# Altium PCB SPBM004_7THK.PCBDOC
Units mm, origin at the board's own origin, x right, y up, seen from the top; angles counter-clockwise.
Board outline 129.79 x 91.92 mm, 2 copper layers (Top Layer, Bottom Layer); 42 components, 38 nets, 169 pads, 42 vias.
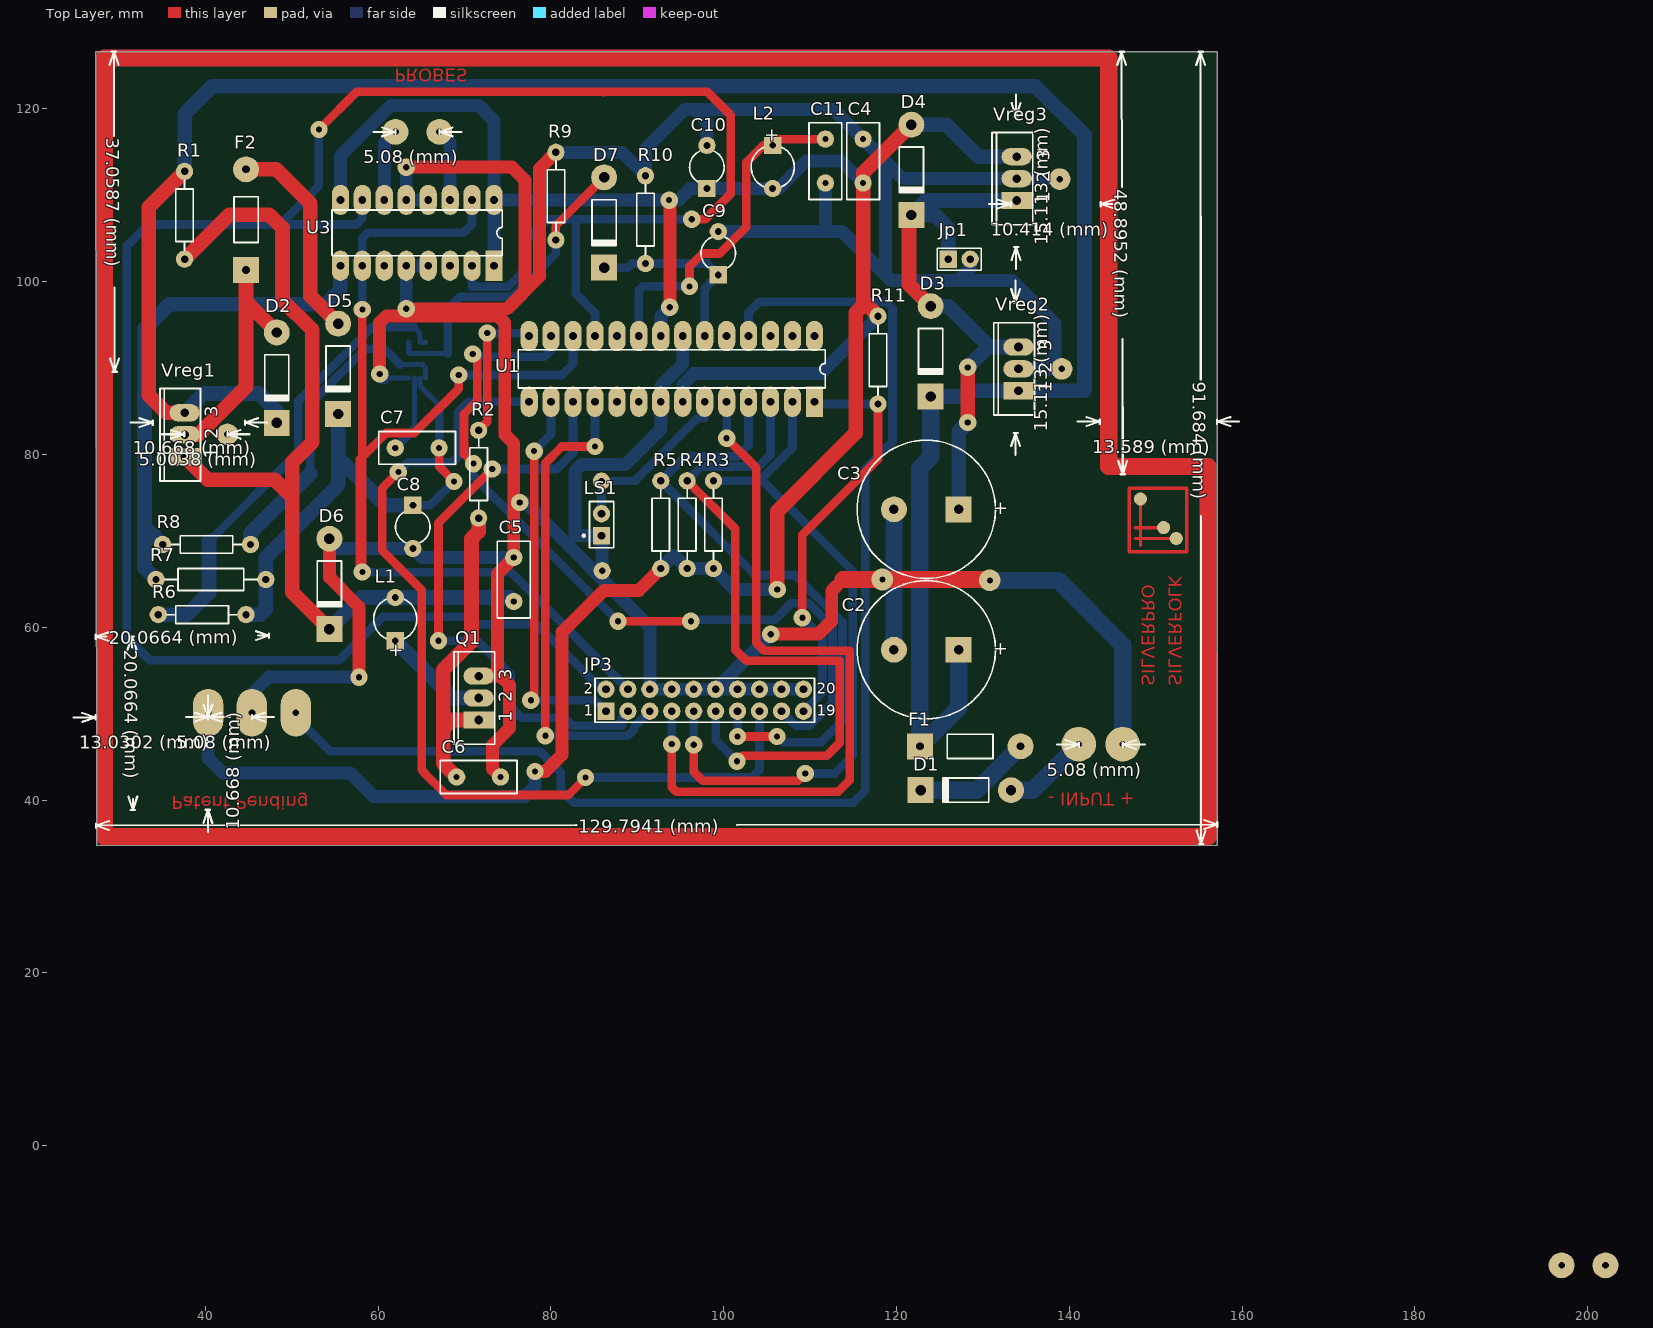
[diagram p0: Top Layer view]
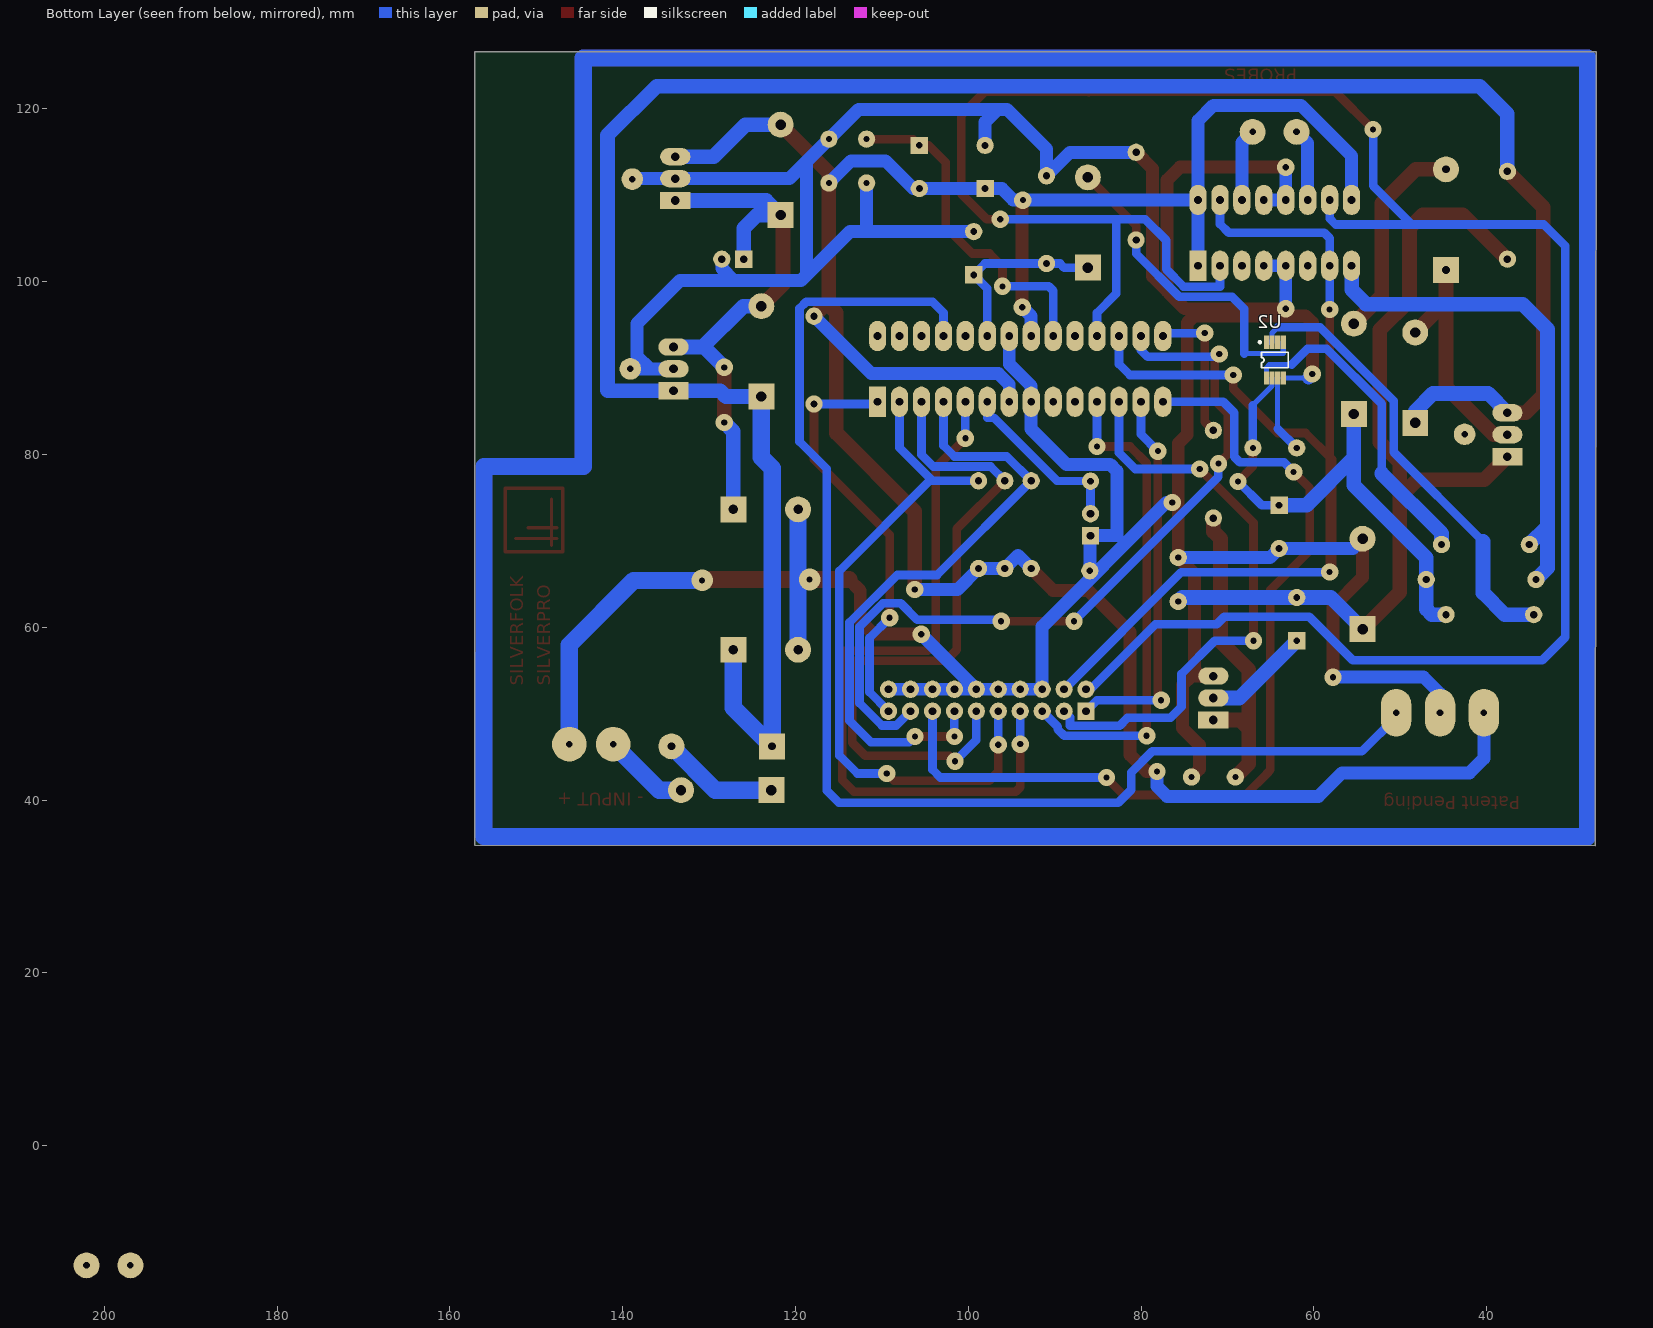
[diagram p1: Bottom Layer view, seen from below]

## Layer stack, top to bottom
Top Layer: signal copper 0.0356
Dielectric: dielectric 0.32, FR-4, Dk 4.8
Bottom Layer: signal copper 0.0356

## Board outline
27.305,126.619 157.099,126.644 157.099,89.052 157.099,34.798 27.41,34.725

## Design rules (kind name [scope] priority, off if disabled: settings)
Clearance [All] p1: gap=0.154
ComponentClearance [All] p1: gap=0.254 collisioncheckmode=0
PolygonConnect [All] p1: connectstyle=Relief reliefconductorwidth=0.254 reliefentries=4 polygonreliefangle="90 Angle"
RoutingLayers [All] p1: top layer=Vertical bottom layer=Horizontal
RoutingVias [All] p1: holewidth=0.711 width=2 viastyle="Through Hole" minholewidth=0.711 minwidth=1.8 maxholewidth=0.711 maxwidth=2
SMDNeckDown [All] p1: percent=90.000
SolderMaskExpansion [All] p1: expansion=0.102
TestPointUsage [All] p1: valid=0 allowmultiple=FALSE
Testpoint [All] p1: side=15 testpointundercomponent=TRUE minsize=1.016 maxsize=2.54 preferedsize=1.524 minholesize=0 maxholesize=1.016 preferedholesize=0.813 testpointgrid=0.025 style=1023 order=1234567890
Width Ground [InNet('GND')] p1: maxlimit=3 minlimit=1 preferedwidth=1.5
Width 5volts [InNet('NetC4_1')] p2: maxlimit=2 minlimit=1 preferedwidth=1.5
Width [All] p3: maxlimit=2 minlimit=0.5 preferedwidth=1
16 further rules are at their usual default settings.

## Components (designator, comment, footprint, x,y, rotation, side; value= is the part's Value field where it differs from the comment)
C2 "Cap1" CAPPR7.5-16X35 123.444,57.404 r180 top
C3 "Cap1" CAPPR7.5-16X35 123.444,73.66 r180 top
C4 "Cap1" RAD-0.2 116.129,113.97 r90 top
C5 "Cap" RAD-0.2 75.692,65.532 r270 top
C6 "Cap" RAD-0.2 71.628,42.672 r180 top
C7 "Cap" RAD-0.2 64.516,80.772 r0 top
C8 "Cap1" CAPR5-4X5 64.008,71.628 r270 top
C9 "Cap1" CAPR5-4X5 99.365,103.302 r90 top
C10 "Cap10" CAPR5-4X5 98.044,113.284 r90 top
C11 "Cap" RAD-0.2 111.76,113.97 r90 top
D1 "SR160" DIO10.46-5.3x2.8 128.016,41.148 r180 top
D2 "Diode 1N4001" DIO10.46-5.3x2.8 48.26,88.9 r270 top
D3 "Diode 1N4001" DIO10.46-5.3x2.8 123.952,91.948 r270 top
D4 "Diode 1N4001" DIO10.46-5.3x2.8 121.717,112.954 r270 top
D5 "Diode 1N4001" DIO10.46-5.3x2.8 55.372,89.916 r270 top
D6 "Diode 1N4001" DIO10.46-5.3x2.8 54.356,65.024 r270 top
D7 "Diode 1N4001" DIO10.46-5.3x2.8 86.157,106.858 r270 top
F1 "3.0A" PIN-W2/E2.8 128.524,46.228 r0 top
F2 "1.0A" PIN-W2/E2.8 44.704,107.188 r90 top
Jp1 "Header 2" HDR1X2 125.984,102.616 r0 top
JP3 "Header 10X2" HDR2X10 86.36,50.292 r0 top
L1 "Inductor" CAPPR5-5X5 61.976,60.96 r90 top
L2 "Inductor Adj" CAPPR5-5X5 105.664,113.284 r270 top
LS1 "Pizo" PIN2 85.852,70.612 r90 top
Q1 "IRL520" TO-220AB 71.628,51.816 r90 top
R1 "Res1" AXIAL-0.4 37.592,107.696 r90 top
R2 "Res1" AXIAL-0.4 71.628,77.724 r270 top
R3 "Res1" AXIAL-0.4 98.806,71.882 r90 top
R4 "Res1" AXIAL-0.4 95.758,71.882 r90 top
R5 "Res1" AXIAL-0.4 92.71,71.882 r90 top
R6 "Res1" AXIAL-0.4 39.624,61.468 r0 top
R7 "Res1" AXIAL-0.5 40.64,65.532 r180 top
R8 "Res1" AXIAL-0.4 40.132,69.596 r180 top
R9 "Res1" AXIAL-0.4 80.569,109.906 r270 top
R10 "Res1" AXIAL-0.4 90.932,107.188 r270 top
R11 "Res1" AXIAL-0.4 117.856,90.932 r90 top
U1 "ATmega8-16PI" 28P3 93.98,89.916 r180 top
U2 "LTC6102" MS8 64.516,90.932 r180 bottom
U3 "SN754410NE" NE016 64.516,105.664 r180 top
Vreg1 "LM317AT" T03B 37.592,82.296 r90 top
Vreg2 "LM7812CT" T03B 134.112,89.916 r90 top
Vreg3 "LM7805CT" T03B 133.909,111.938 r90 top

## Footprints (in the part's own frame and the unit in brackets; to place one, negate y for a bottom-side part, rotate by r counter-clockwise, add the part's x,y. Pads: shape width x height; smd on the part's side, far side on the other; paste and mask are expansions set on the pad)
28P3 [mm] "DIP; 28 Leads; Row Spacing 7.62 mm; Pitch 2.54 mm"
  rect 2x3.5 hole 0.9: 1(-16.51,3.81)
  oval 2x3.5 hole 0.9: 2(-13.97,3.81) 3(-11.43,3.81) 4(-8.89,3.81) 5(-6.35,3.81) 6(-3.81,3.81) 7(-1.27,3.81) 8(1.27,3.81) 9(3.81,3.81) 10(6.35,3.81) 11(8.89,3.81) 12(11.43,3.81) 13(13.97,3.81) 14(16.51,3.81) 15(16.51,-3.81) 16(13.97,-3.81) 17(11.43,-3.81) 18(8.89,-3.81) 19(6.35,-3.81) 20(3.81,-3.81) 21(1.27,-3.81) 22(-1.27,-3.81) 23(-3.81,-3.81) 24(-6.35,-3.81) 25(-8.89,-3.81) 26(-11.43,-3.81) 27(-13.97,-3.81) 28(-16.51,-3.81)
  silkscreen extent -17.78,-2.22 17.78,2.22
AXIAL-0.4 [mm]
  round 2 hole 0.85: 1(-5.08,0) 2(5.08,0)
  silkscreen extent -4.06,-1.02 4.06,1.02
AXIAL-0.5 [mm]
  round 2 hole 0.85: 1(-6.35,0) 2(6.35,0)
  silkscreen extent -5.33,-1.27 5.33,1.27
CAPPR5-5X5 [mm]
  rect 2x2 hole 0.75: 1(-2.5,0)
  round 2 hole 0.8: 2(2.5,0)
  silkscreen extent -2.26,-2.5 2.27,2.5
CAPPR7.5-16X35 [mm]
  rect 3x3 hole 1.1: 1(-3.75,0)
  round 3 hole 1.1: 2(3.75,0)
  silkscreen extent -8,-8 8,8
CAPR5-4X5 [mm]
  rect 2x2 hole 0.8: 1(-2.5,0)
  round 2 hole 0.8: 2(2.5,0)
  silkscreen extent -1.69,-2 1.82,2
DIO10.46-5.3x2.8 [mm]
  round 3 hole 1.2: 1(-5.23,0)
  rect 3x3 hole 1.2: 2(5.23,0)
  silkscreen extent -2.65,-1.41 2.75,1.4
HDR1X2 [mm] "Connector; Header; 2 Position"
  rect 2x2 hole 0.9: 1(0,0)
  round 2 hole 0.9: 2(2.54,0)
  silkscreen extent -1.27,-1.27 3.81,1.27
HDR2X10 [mm] "Connector; Header; 10x2 Position"
  rect 2x2 hole 0.9: 1(0,0)
  round 2 hole 0.9: 2(0,2.54) 3(2.54,0) 4(2.54,2.54) 5(5.08,0) 6(5.08,2.54) 7(7.62,0) 8(7.62,2.54) 9(10.16,0) 10(10.16,2.54) 11(12.7,0) 12(12.7,2.54) 13(15.24,0) 14(15.24,2.54) 15(17.78,0) 16(17.78,2.54) 17(20.32,0) 18(20.32,2.54) 19(22.86,0) 20(22.86,2.54)
  silkscreen extent -1.27,-1.27 24.13,3.81
MS8 [mm] "Shrink Small Outline; 8 Leads; Body Width 3 mm; Pitch 0.65 mm"
  rect 0.6x1.55 smd: 1(-0.975,2.075) 2(-0.325,2.075) 3(0.325,2.075) 4(0.975,2.075) 5(0.975,-2.075) 6(0.325,-2.075) 7(-0.325,-2.075) 8(-0.975,-2.075)
  silkscreen extent -1.85,-0.9 1.55,2.2
NE016 [mm] "DIP; 16 Leads; Row Spacing 7.62 mm; Pitch 2.54 mm"
  rect 2x3.5 hole 0.9: 1(-8.89,3.81)
  oval 2x3.5 hole 0.9: 2(-6.35,3.81) 3(-3.81,3.81) 4(-1.27,3.81) 5(1.27,3.81) 6(3.81,3.81) 7(6.35,3.81) 8(8.89,3.81) 9(8.89,-3.81) 10(6.35,-3.81) 11(3.81,-3.81) 12(1.27,-3.81) 13(-1.27,-3.81) 14(-3.81,-3.81) 15(-6.35,-3.81) 16(-8.89,-3.81)
  silkscreen extent -9.85,-2.65 9.85,2.65
PIN2 [mm]
  rect 2x2 hole 0.9: 1(0,0)
  round 2 hole 0.9: 2(2.54,0)
  silkscreen extent -1.4,-1.4 3.94,2.17
PIN-W2/E2.8 [mm]
  rect 3x3 hole 0.9: 1(-5.825,0)
  round 3 hole 0.9: 2(5.825,0)
  silkscreen extent -2.65,-1.4 2.65,1.4
RAD-0.2 [mm]
  round 2 hole 0.7: 1(-2.54,0) 2(2.54,0)
  silkscreen extent -4.44,-1.91 4.44,1.91
T03B [mm] "TO, Thru-Hole, Vertical, Heatsink Mounted; 3 In-Line Leads; Pitch 2.54 mm"
  rect 2x3.5 hole 1: 1(-2.54,0)
  oval 2x3.5 hole 1: 2(0,0) 3(2.54,0)
  silkscreen extent -5.35,-1.85 5.35,2.85
TO-220AB [mm] "TO, Thru-Hole, Vertical, Heatsink Mounted; 3 In-Line Leads; Pitch 2.54 mm"
  rect 2x3.5 hole 1: 1(-2.54,0)
  oval 2x3.5 hole 1: 2(0,0) 3(2.54,0)
  silkscreen extent -5.35,-1.85 5.35,2.85

## Part data
C2 C3 C4 C8 C9 C10: library part Cap2, "Capacitor"
C5 C6 C7 C11: "Capacitor"
D1: library part "Diode 11DQ03", "Schottky Rectifier"
D2 D3 D4 D5 D6 D7: "1 Amp General Purpose Rectifier"
F1 F2: library part "Fuse 2", "Fuse"
Jp1: "Header, 2-Pin"
JP3: "Header, 10-Pin, Dual row"
L1: library part "Inductor Adj", "Adjustable Inductor"
L2: "Adjustable Inductor"
LS1: library part Speaker, "Loudspeaker"
Q1: "HEXFET N-Channel Power MOSFET"
R1 R2 R3 R4 R5 R6 R7 R8 R9 R10 R11: "Resistor"
U1: "8-Bit AVR Microcontroller with 8K Bytes of In-System Programmable Flash Memory"
U2: library part LTC1150CS8, "?5V Chopper Stabilised Operational Amplifier with Internal Capacitors"
U3: "Quadruple Half-H Driver"
Vreg1: "3-Terminal Adjustable Regulator"
Vreg2: library part LM7805CT, "Series 3-Terminal Positive Regulator"
Vreg3: "Series 3-Terminal Positive Regulator"

## Free pads (board coordinates)
  oval 3.524x5.524 hole 0.762: 0(45.39,50.114) 1(40.31,50.114) 2(50.47,50.114)
  round 2 hole 0.762: 0(85.852,76.911) 1(85.928,66.548)
  round 3 hole 0.762: 2(67.081,117.348) 2(196.977,-13.843) 3(62.001,117.348) 3(202.057,-13.843)
  round 2.5 hole 0.762: 2(138.887,111.887) 3(139.116,89.916) 4(42.545,82.347)
  round 4 hole 0.762: 2(141.097,46.482) 3(146.177,46.482)
  round 1.524 smd: 2(152.375,70.282) 3(150.901,71.552) 4(148.234,74.854)

## Via types
v1: diameter 2, hole 0.711, Top Layer to Bottom Layer, 40 vias
v2: diameter 2.5, hole 0.711, Top Layer to Bottom Layer, 2 vias

## Nets (pads, with @x,y where several pads share a name; then routed paths per layer and width w, separated by ;. In a path a pad name is that pad's centre, name@x,y a point inside that pad or via, vN(x,y) a via of type N, cw(c..) or ccw(c..) an arc to the next point about the centre after c; other vN are vias at no path point)
GND: C2.2 C3.2 C4.2 C5.1 C6.1 C8.2 C9.2 C10.2 C11.1 D6.1 Jp1.2 JP3.6 JP3.8 JP3.10 JP3.12 JP3.14 JP3.16 JP3.18 JP3.20 LS1.1 pad.0@45.39,50.114 pad.1@85.928,66.548 pad.2@138.887,111.887 pad.3@139.116,89.916 pad.3@146.177,46.482 Q1.3 R9.1 R10.1 U1.8 U1.22 U2.5 U3.4 U3.5 U3.12 U3.13 Vreg2.2 Vreg3.2 | length 534.6
  Top Layer w1.5: D6.1 54.356,65.786 57.785,62.357 v1(57.785,54.229) ; v1(60.173,89.332) 60.173,95.275 60.96,96.063 73.838,96.063 ; v1(63.246,96.876) 74.93,96.876 78.664,100.609 78.664,113.081 R9.1 ; v1(63.246,113.259) 75.489,113.259 76.987,111.76 76.987,98.933 ; 73.025,96.876 74.651,95.25 74.651,82.321 75.692,81.28 C5.1 73.787,66.167 73.787,55.067 73.025,54.305 71.679,54.305 Q1.3 74.168,54.356 75.209,53.315 75.209,48.336 73.228,46.355 73.228,43.612 C6.1 ; v1@75.692,73.762 v1(76.378,74.447) ; v1(105.435,59.207) 110.947,59.207 112.497,60.757 112.497,64.237 113.792,65.532 ; v2@130.708,65.532 v2(130.81,65.43)
  Top Layer w2: 113.792,65.532 v2@130.708,65.532
  Bottom Layer w0.36: U2.5 U2.5@63.541,88.875
  Bottom Layer w0.6: v1@60.63,88.875 U2.5@63.541,88.875
  Bottom Layer w1.5: pad.0@45.39,50.114 45.39,52.349 47.295,54.254 v1(57.785,54.229) ; D6.1 55.482,69.128 C8.2 65.064,68.072 C5.1 ; v1(60.173,89.332) v1@60.63,88.875 ; v1(63.246,96.876) U3.5 U3.4 ; v1(63.246,113.259) U3.12 U3.13 ; v1(76.378,74.447) 77.064,74.447 91.44,60.071 JP3.6 JP3.8 JP3.10 JP3.12 ; R9.1 88.214,114.986 R10.1 90.932,115.392 95.504,119.964 112.674,119.964 120.701,111.938 138.836,111.938 pad.2@138.887,111.887 ; pad.1@85.928,66.548 85.928,70.536 LS1.1 82.804,70.612 82.804,78.105 83.566,78.867 88.642,78.867 92.71,82.935 U1.8 92.71,87.935 95.25,90.475 U1.22 ; 96.571,119.964 98.044,118.491 C10.2 ; C9.2 113.705,105.802 119.38,100.127 133.375,100.127 138.354,95.148 138.354,91.415 136.855,89.916 ; v1(105.435,59.207) JP3.12 ; JP3.20 JP3.18 JP3.16 JP3.14 JP3.12 ; 111.76,105.802 C11.1 ; 118.72,100.787 118.72,113.919 ; 119.643,65.557 119.694,65.507 ; 127.102,100.127 128.524,101.549 Jp1.2 ; Vreg2.2 pad.3@139.116,89.916
  Bottom Layer w2: v2(118.364,65.532) 119.643,65.557 ; C2.2 C3.2 ; v2(130.81,65.43) 138.709,65.43 146.177,57.963 pad.3@146.177,46.482
NC: U2.3
NetC1_1: C2.1 D2.2 D3.2 F1.1 R1.2 Vreg1.3 Vreg2.1 | length 262.6
  Top Layer w1.7: Vreg1.3 35.484,84.836 33.452,86.868 33.452,88.798 33.452,108.636 R1.2
  Bottom Layer w1: F1.1 F1.1@122.733,46.228 ; Vreg2.1@134.036,87.376 Vreg2.1@134.061,87.351 ; 141.707,87.376 141.757,87.427
  Bottom Layer w1.7: Vreg1.3 39.827,87.071 46.203,87.071 48.26,85.014 D2.2 ; R1.2 37.592,119.431 40.792,122.631 136.068,122.631 141.757,116.942 141.757,90.703 141.757,87.427 ; D3.2 128.044,86.718 128.702,87.376 Vreg2.1 141.707,87.376
  Bottom Layer w2: F1.1 122.699,78.427 123.952,79.68 D3.2 ; F1.1@122.733,46.228 127.194,50.689 C2.1
NetC3_1: C3.1 D3.1 D4.2 Jp1.1 Vreg2.3 Vreg3.1 | length 65.7
  Top Layer w1: D4.2@121.437,107.444 D4.2 ; Vreg3.1 Vreg3.1@134.112,109.398
  Top Layer w1.7: D4.2@121.437,107.444 121.437,99.693 D3.1 ; v1(128.245,83.718) v1(128.245,90.094)
  Bottom Layer w1.7: D3.1 126.012,97.178 130.734,92.456 ; Jp1.1 125.984,106.2 124.46,107.724 D4.2 123.391,109.398 Vreg3.1 ; C3.1 127.194,82.668 v1(128.245,83.718) ; v1(128.245,90.094) 130.607,92.456 Vreg2.3
NetC4_1: C4.1 C10.1 D4.1 L2.2 pad.1@40.31,50.114 R3.1 R4.1 R5.1 R11.2 U1.7 U1.21 U3.1 U3.9 U3.16 Vreg3.3 | length 304.4
  Top Layer w1.5: v1(78.156,43.307) 79.35,43.307 81.28,45.237 81.28,59.436 86.131,64.287 90.195,64.287 R5.1 ; v1(93.675,109.449) 93.751,109.372 v1(93.751,97.053)
  Top Layer w1.7: v1(106.197,64.389) 106.197,73.406 115.291,82.499 115.291,96.418 116.129,97.257 116.129,112.596 D4.1 ; 116.129,97.739 R11.2
  Bottom Layer w1.5: pad.1@40.31,50.114 40.31,44.831 41.986,43.155 56.744,43.155 59.461,40.437 76.987,40.437 78.156,41.605 v1(78.156,43.307) ; U3.9 55.626,114.554 61.493,120.421 71.628,120.421 73.406,118.643 U3.16 ; U3.1 U3.16 ; R5.1 94.234,68.326 R4.1 R3.1 101.219,64.389 v1(106.197,64.389) ; U1.21 92.71,96.012 v1(93.751,97.053) ; U1.7 95.25,88.113 96.52,89.383 111.227,89.383 R11.2 ; C4.1 113.589,113.97 109.55,113.97 106.364,110.784 L2.2 C10.1 96.103,110.784 94.793,109.474 U3.16
  Bottom Layer w1.7: D4.1 125.781,118.184 129.487,114.478 Vreg3.3
NetC5_2: C5.2 D6.2 L1.2 R1.1 Vreg1.1 | length 102.3
  Top Layer w1: Vreg1.1 Vreg1.1@37.617,79.756 ; R1.1@37.592,102.718 R1.1 R1.1@37.617,102.616
  Top Layer w1.7: Vreg1.1@37.617,79.756 40.284,77.089 48.031,77.089 50.063,75.057 ; R1.1@37.617,102.616 42.774,107.772 47.396,107.772 48.92,106.248 48.92,97.866 52.349,94.437 52.349,85.877 52.349,81.407 50.063,79.121 50.063,64.087 D6.2
  Bottom Layer w1.7: D6.2 58.022,63.46 75.224,63.46 C5.2
NetC6_2: C6.2 Q1.1 R2.2 | length 36.8
  Top Layer w1.7: 67.539,48.26 68.555,49.276 Q1.1 ; C6.2 67.539,44.221 67.539,55.093 70.79,58.344 70.79,70.256 71.628,71.095 R2.2
NetC7_1: C7.1 U2.6 | length 9
  Bottom Layer w0.6: 64.191,82.987 U2.6
  Bottom Layer w1: C7.1 64.191,82.987
NetC7_2: C7.2 C8.1 D5.2 R6.2 R7.1 U2.7 | length 59
  Top Layer w1: C7.2 67.056,78.613 v1(68.783,76.886)
  Bottom Layer w0.6: U2.7 64.841,87.94 67.056,85.725
  Bottom Layer w1: 55.372,76.429 55.372,76.454 ; C8.1 66.025,74.128 v1(68.783,76.886) ; C7.2 67.056,85.725
  Bottom Layer w1.7: R6.2 46.33,61.468 46.99,62.128 46.99,68.047 55.372,76.429 ; 55.372,76.454 D5.2 ; 55.372,79.604 60.848,74.128 C8.1
NetC9_1: C9.1 D7.2 R10.2 U1.23 | length 21.7
  Bottom Layer w1: D7.2 88.905,101.628 89.385,102.108 R10.2 98.059,102.108 C9.1 97.79,99.227 U1.23
NetC11_2: C11.2 L2.1 U1.20 | length 39.8
  Top Layer w1: v1(96.037,99.466) 96.037,101.778 97.536,103.276 99.543,103.276 102.591,106.324 102.591,113.817 104.557,115.784 L2.1 106.39,116.51 C11.2
  Bottom Layer w1: U1.20 90.17,98.958 90.678,99.466 v1(96.037,99.466)
NetD1_1: D1.1 pad.2@141.097,46.482 | length 10.1
  Bottom Layer w2: D1.1 135.763,41.148 pad.2@141.097,46.482
NetD1_2: D1.2 F1.2 | length 13.7
  Bottom Layer w2: D1.2 129.269,41.148 F1.2
NetD2_1: D2.1 F2.1 Vreg1.2 | length 28
  Top Layer w1.7: Vreg1.2 39.167,82.296 44.704,87.833 44.704,97.686 ; F2.1 44.704,97.686 ; D2.1 44.704,97.686
NetD5_1: D5.1 F2.2 | length 24.3
  Top Layer w1.7: F2.2 48.201,113.013 52.146,109.068 52.146,98.372 D5.1
NetD7_1: D7.1 R9.2 U2.4 | length 37.3
  Top Layer w1: R9.2 80.569,106.5 D7.1
  Bottom Layer w0.6: U2.4 63.541,91.694 68.072,91.694
  Bottom Layer w1: 68.072,91.694 68.072,96.876 69.469,98.273 75.565,98.273 80.569,103.276 R9.2
NetJP2_1: pad.3@62.001,117.348 U3.11 | length 8.4
  Bottom Layer w1.5: U3.11 60.706,116.053 pad.3@62.001,117.348
NetJP2_2: pad.2@67.081,117.348 U3.14 | length 8.4
  Bottom Layer w1.5: pad.2@67.081,117.348 68.326,116.103 U3.14
NetJP3_1: JP3.1 U1.13 | length 44.7
  Top Layer w1: v1(77.673,51.562) 78.054,51.943 v1(78.054,80.391)
  Bottom Layer w1: v1(77.673,51.562) 85.09,51.562 JP3.1 ; v1(78.054,80.391) 80.01,82.347 U1.13
NetJP3_2: JP3.2 U1.18 U3.2 U3.10 | length 264
  Top Layer w1: v1(53.137,117.627) 57.506,121.996 98.095,121.996 100.813,119.278 100.813,110.185 97.866,107.239 v1(96.291,107.239) ; 86.055,121.971 86.055,121.996
  Bottom Layer w1: 48.666,106.629 53.137,111.1 v1(53.137,117.627) ; U3.10 58.166,107.315 57.48,106.629 33.376,106.629 30.886,104.14 30.886,58.852 33.553,56.185 55.499,56.185 60.528,61.214 70.358,61.214 71.222,60.35 78.334,60.35 85.852,52.832 JP3.2 ; U3.2 70.866,99.441 75.082,99.441 77.089,101.448 77.089,104.8 79.527,107.239 v1(96.291,107.239) ; 82.855,107.239 82.855,98.628 85.09,96.393 U1.18
NetJP3_3: JP3.3 U1.12 | length 68
  Top Layer w1: v1(66.98,58.445) 66.98,72.111 v1(73.203,78.334)
  Bottom Layer w1: v1(66.98,58.445) 71.476,58.445 75.311,54.61 75.311,50.8 76.581,49.53 81.559,49.53 82.474,48.616 88.214,48.616 88.214,49.606 JP3.3 ; v1(73.203,78.334) 80.67,78.334 82.55,80.213 U1.12
NetJP3_4: JP3.4 U1.17 U3.7 U3.15 | length 137.7
  Top Layer w1: v1(58.166,96.799) 58.166,79.705 ; v1(69.317,89.205) 69.317,87.63 64.186,82.499 60.96,82.499 58.166,79.705 ; 58.166,79.705 57.887,79.426 57.887,66.675 v1(58.166,66.396) 58.166,79.705
  Bottom Layer w1: v1(58.166,66.396) 75.336,66.396 JP3.4 ; v1(58.166,96.799) U3.7 58.166,105.029 58.801,105.664 69.85,105.664 70.866,106.68 U3.15 ; v1(69.317,89.205) 81.28,89.205 82.55,90.475 U1.17
NetJP3_5: JP3.5 U1.11 | length 56.7
  Top Layer w1: v1(79.35,47.447) 79.35,78.994 81.28,80.924 v1(85.09,80.924)
  Bottom Layer w1: v1(79.35,47.447) 88.9,47.447 89.637,48.184 89.637,48.489 JP3.5 ; v1(85.09,80.924) U1.11
NetJP3_7: JP3.7 U1.5 | length 85.7
  Top Layer w1: v1(93.98,46.482) 93.98,41.504 94.513,40.97 113.233,40.97 114.579,42.316 114.579,57.302 104.673,57.302 103.759,58.217 103.759,78.461 v1(100.33,81.89)
  Bottom Layer w1: v1(93.98,46.482) JP3.7 ; v1(100.33,81.89) U1.5
NetJP3_9: JP3.9 R3.2 U1.2 | length 79.6
  Top Layer w1: v1(96.52,46.406) 96.52,43.282 97.561,42.24 108.585,42.24 v1(109.423,43.078)
  Bottom Layer w1: v1(96.52,46.406) JP3.9 ; R3.2 104.47,76.962 114.91,66.523 114.91,45.161 112.827,43.078 v1(109.423,43.078) ; 104.14,76.962 107.95,80.772 U1.2
NetJP3_11: JP3.11 R4.2 U1.3 | length 80.6
  Top Layer w1: R4.2 101.321,71.399 101.321,57.404 102.591,56.134 113.411,56.134 113.411,46.634 111.912,45.136 102.159,45.136 v1(101.524,44.501)
  Bottom Layer w1: R4.2 97.412,78.616 104.064,78.616 105.41,79.962 U1.3 ; JP3.11 99.06,46.965 v1(101.524,44.501)
NetJP3_13: JP3.13 R5.2 U1.4 | length 72.5
  Top Layer w1: v1(101.6,47.371) v1(106.172,47.371)
  Bottom Layer w1: v1(101.6,47.371) JP3.13 ; U1.4 102.87,81.051 101.6,79.781 95.529,79.781 R5.2 103.607,66.065 108.229,66.065 113.741,60.554 113.741,49.174 111.252,46.685 106.858,46.685 v1(106.172,47.371)
NetJP3_15: JP3.15 U1.14 | length 107.2
  Top Layer w1: v1(62.332,77.978) 60.452,76.098 60.452,68.936 65.024,64.364 65.024,43.51 65.44,43.094 65.44,43.044 ; 65.303,43.18 67.894,40.589 82.017,40.589 83.998,42.57 v1(83.998,42.621)
  Bottom Layer w1: v1(62.332,77.978) 63.449,79.096 68.58,79.096 69.215,79.731 69.215,84.836 70.485,86.106 U1.14 ; v1(83.998,42.621) 103.226,42.621 104.14,43.536 JP3.15
NetJP3_17: JP3.17 U1.16 | length 93.7
  Top Layer w1: v1(70.942,91.643) 71.12,91.643 71.45,91.313 71.45,86.208 69.926,84.684 69.926,80.061 v1(71.044,78.943) ; v1(87.757,60.706) v1(96.19,60.706)
  Bottom Layer w1: v1(70.942,91.643) 71.272,91.313 79.239,91.313 80.01,92.084 U1.16 ; v1(71.044,78.943) 71.044,77.419 v1(87.757,60.706) ; v1(96.19,60.706) 96.368,60.884 105.918,60.884 107.823,62.789 109.866,62.789 112.584,60.071 112.584,51.243 109.979,48.638 108.334,48.638 JP3.17
NetJP3_19: JP3.19 R11.1 U1.1 | length 48.7
  Top Layer w1: v1(109.093,61.112) 109.093,70.688 117.856,79.451 R11.1
  Bottom Layer w1: v1(109.093,61.112) 111.43,58.776 111.43,52.502 JP3.19 ; U1.1 110.49,85.852 R11.1
NetL1_1: L1.1 Q1.2 | length 12.4
  Bottom Layer w1.7: L1.1 68.62,51.816 Q1.2
NetLS1_2: LS1.2 pad.0@85.852,76.911 U1.6 | length 20.6
  Bottom Layer w1: LS1.2 85.852,76.911 89.738,76.962 97.053,84.277 97.79,84.277 U1.6
NetR2_1: R2.1 U1.15 | length 16.8
  Top Layer w1: R2.1 72.619,83.795 v1(72.619,94.056)
  Bottom Layer w1: v1(72.619,94.056) 77.47,94.056 U1.15
NetR6_1: R6.1 U2.1 U2.2 | length 53
  Bottom Layer w0.36: U2.2@64.841,92.989 U2.2 ; U2.1@65.491,92.989 U2.1
  Bottom Layer w0.6: 64.191,94.717 64.841,94.067 U2.2 ; U2.2@64.841,92.989 U2.1@65.491,92.989
  Bottom Layer w1: 40.411,69.926 50.749,80.264 50.749,86.208 59.258,94.717 64.191,94.717
  Bottom Layer w1.7: R6.1 37.897,61.468 40.411,63.983 40.411,69.926
NetR7_2: R7.2 R8.2 U3.8 | length 59.9
  Bottom Layer w1.7: 32.944,71.704 R8.2 ; R7.2 32.944,66.878 32.944,75.006 32.944,94.488 35.839,97.384 53.95,97.384 55.626,99.06 U3.8
NetR8_1: R8.1 U2.8 | length 37.3
  Bottom Layer w0.6: 62.56,90.424 65.202,90.424 65.481,90.068 U2.8
  Bottom Layer w1: 52.146,77.8 52.146,85.877 58.522,92.253 60.757,92.253 60.757,92.227 62.56,90.424
  Bottom Layer w1.7: R8.1 45.212,70.866 52.146,77.8
NetR12_3: pad.2@50.47,50.114 U1.25 | length 149.6
  Bottom Layer w1: pad.2@50.47,50.114 50.47,49.606 54.432,45.644 78.689,45.644 81.128,43.205 81.128,41.199 82.626,39.7 114.96,39.7 116.357,41.097 116.357,78.334 119.532,81.509 119.532,96.901 118.745,97.688 104.14,97.688 102.87,96.418 U1.25
NetR13_3: U1.24
pads on no net: U1.9 U1.10 U1.19 U1.26 U1.27 U1.28 U3.3 U3.6
copper on no net: | length 41.6
  Top Layer w0.4: 147.599,70.282 152.375,70.282 ; 147.599,71.552 150.901,71.552 ; 148.234,69.52 148.234,74.854 ; 146.939,68.732 153.568,68.732 153.568,76.098 146.939,76.098 146.939,68.732
  Bottom Layer w0.8: 202.057,-13.843 202.184,-13.716

## Other copper
Top Layer:
  text "PROBES" at 61.9,124.663 h1.52 r180
  text "SILVERPRO" at 148.361,53.264 h1.52 r270
  text "SILVERFOLK" at 151.511,53.264 h1.52 r270
  text "- INPUT +" at 137.566,40.843 h1.52 r180
  text "Patent Pending" at 36.093,40.462 h1.52 r180
Multi-Layer:
  lines w2: 28.296,125.882 28.321,35.763 156.083,35.789 156.058,78.613 144.577,78.613 144.551,125.908 28.296,125.882

## Silkscreen, mask and mechanical layers (free items; w line width, h text height)
Top Overlay:
  lines w0.254: 24.74,49.576 27.28,49.581 ; 25.755,50.086 27.28,49.581 ; 25.757,49.07 27.28,49.581 ; 27.28,49.327 27.279,49.835 ; 27.3,59.172 27.303,58.664 ; 27.327,36.8 27.326,37.308 ; 28.549,58.926 27.302,58.918 ; 28.823,59.436 27.302,58.918 ; 28.829,58.42 27.302,58.918 ; 28.851,36.548 27.327,37.054 ; 28.85,37.564 27.327,37.054 ; 28.908,125.119 29.413,126.644 ; 28.978,91.109 29.489,89.586 ; 29.159,126.644 29.667,126.645 ; 29.235,89.585 29.743,89.586 ; 29.433,116.901 29.413,126.644 ; 29.469,99.329 29.489,89.586 ; 29.924,125.121 29.413,126.644 ; 29.994,91.111 29.489,89.586 ; 30.988,57.404 31.486,58.931 ; 31.096,40.386 31.613,38.865 ; 31.232,58.93 31.74,58.933 ; 31.359,38.864 31.867,38.867 ; 31.369,83.693 33.909,83.693 ; 31.494,57.684 31.486,58.931 ; 31.605,40.113 31.613,38.865 ; 32.004,57.41 31.486,58.931 ; 32.112,40.392 31.613,38.865 ; 32.385,83.185 33.909,83.693 ; 32.385,84.201 33.909,83.693 ; 33.909,83.439 33.909,83.947 ; 35.001,82.347 37.541,82.347 ; 36.017,81.839 37.541,82.347 ; 36.017,82.855 37.541,82.347 ; 37.541,82.093 37.541,82.601 ; 37.77,49.606 40.31,49.606 ; 38.786,49.098 40.31,49.606 ; 38.786,50.114 40.31,49.606 ; 39.776,37.363 40.284,38.887 ; 39.776,51.079 40.284,49.555 ; 40.03,38.887 40.538,38.887 ; 40.03,49.555 40.538,49.555 ; 40.284,36.347 40.284,38.887 ; 40.284,52.095 40.284,49.555 ; 40.792,37.363 40.284,38.887 ; 40.792,51.079 40.284,49.555 ; 41.833,50.117 40.31,49.606 ; 41.835,49.101 40.31,49.606 ; 42.545,82.093 42.545,82.601 ; 42.85,49.611 40.31,49.606 ; 44.069,81.839 42.545,82.347 ; 44.069,82.855 42.545,82.347 ; 44.577,83.439 44.577,83.947 ; 45.085,82.347 42.545,82.347 ; 45.39,49.352 45.39,49.86 ; 45.841,59.544 47.368,59.045 ; 45.847,58.528 47.368,59.045 ; 46.101,83.185 44.577,83.693 ; 46.101,84.201 44.577,83.693 ; 46.12,59.037 47.368,59.045 ; 46.914,49.098 45.39,49.606 ; 46.914,50.114 45.39,49.606 ; 47.117,83.693 44.577,83.693 ; 47.366,59.299 47.369,58.791 ; 47.93,49.606 45.39,49.606 ; 59.461,117.348 62.001,117.348 ; 60.477,116.84 62.001,117.348 ; 60.477,117.856 62.001,117.348 ; 62.001,117.094 62.001,117.602 ; 67.081,117.094 67.081,117.602 ; 68.605,116.84 67.081,117.348 ; 68.605,117.856 67.081,117.348 ; 69.621,117.348 67.081,117.348 ; 82.93,37.109 27.327,37.054 ; 101.517,37.127 157.121,37.181 ; 130.683,108.991 133.223,108.991 ; 131.699,108.483 133.223,108.991 ; 131.699,109.499 133.223,108.991 ; 133.223,108.737 133.223,109.245 ; 133.274,80.975 133.782,82.499 ; 133.274,99.136 133.782,97.612 ; 133.325,102.514 133.833,104.038 ; 133.325,120.675 133.833,119.151 ; 133.528,82.499 134.036,82.499 ; 133.528,97.612 134.036,97.612 ; 133.579,104.038 134.087,104.038 ; 133.579,119.151 134.087,119.151 ; 133.782,79.959 133.782,82.499 ; 133.782,100.152 133.782,97.612 ; 133.833,101.498 133.833,104.038 ; 133.833,121.691 133.833,119.151 ; 134.29,80.975 133.782,82.499 ; 134.29,99.136 133.782,97.612 ; 134.341,102.514 133.833,104.038 ; 134.341,120.675 133.833,119.151 ; 138.557,46.431 141.097,46.431 ; 139.573,45.923 141.097,46.431 ; 139.573,46.939 141.097,46.431 ; 140.97,83.82 143.51,83.82 ; 141.097,46.177 141.097,46.685 ; 141.986,83.312 143.51,83.82 ; 141.986,84.328 143.51,83.82 ; 143.51,83.566 143.51,84.074 ; 143.637,108.737 143.637,109.245 ; 145.161,108.483 143.637,108.991 ; 145.161,109.499 143.637,108.991 ; 145.546,125.094 146.05,126.619 ; 145.665,79.247 146.177,77.724 ; 145.796,126.618 146.304,126.62 ; 145.923,77.723 146.431,77.725 ; 146.091,110.957 146.05,126.619 ; 146.136,93.386 146.177,77.724 ; 146.177,46.177 146.177,46.685 ; 146.177,108.991 143.637,108.991 ; 146.562,125.096 146.05,126.619 ; 146.681,79.249 146.177,77.724 ; 147.701,45.923 146.177,46.431 ; 147.701,46.939 146.177,46.431 ; 148.717,46.431 146.177,46.431 ; 154.687,125.095 155.194,126.619 ; 154.737,36.459 155.245,34.935 ; 154.94,126.619 155.448,126.619 ; 154.991,34.935 155.499,34.935 ; 155.215,88.674 155.194,126.619 ; 155.224,72.88 155.245,34.935 ; 155.597,36.672 157.121,37.181 ; 155.596,37.688 157.121,37.181 ; 155.703,125.095 155.194,126.619 ; 155.753,36.459 155.245,34.935 ; 157.099,83.566 157.099,84.074 ; 157.121,36.927 157.12,37.435 ; 158.623,83.312 157.099,83.82 ; 158.623,84.328 157.099,83.82 ; 159.639,83.82 157.099,83.82 ; 40.31,49.352 40.309,49.86 40.31,49.352
  text "37.0587 (mm)" at 28.52,116.645 h1.52 r270.12
  text "5.08 (mm)" at 58.295,113.691 h1.52
  text "48.8952 (mm)" at 145.177,110.701 h1.52 r270.15
  text "10.414 (mm)" at 130.914,105.335 h1.52
  text "15.113 (mm)" at 137.489,104.206 h1.52 r90
  text "91.684 (mm)" at 154.301,88.419 h1.52 r270.03
  text "15.113 (mm)" at 137.438,82.667 h1.52 r90
  text "13.589 (mm)" at 142.662,80.163 h1.52
  text "10.668 (mm)" at 31.6,80.036 h1.52
  text "5.0038 (mm)" at 32.273,78.69 h1.52
  text "20.0664 (mm)" at 28.809,58.014 h1.52 r0.36
  text "20.0664 (mm)" at 30.582,57.424 h1.52 r270.36
  text "5.08 (mm)" at 36.603,45.95 h1.52
  text "13.0302 (mm)" at 25.397,45.921 h1.52 r0.11
  text "5.08 (mm)" at 137.391,42.775 h1.52
  text "10.668 (mm)" at 43.941,36.578 h1.52 r90
  text "129.7941 (mm)" at 83.185,36.195 h1.52 r0.06

## Text inside footprints (layer, text, board x,y; h text height)
C2: Top Overlay "+" at 132.919,58.154 h1.5 r180
C3: Top Overlay "+" at 132.919,74.41 h1.5 r180
JP3: Top Overlay "20" at 110.744,52.324 h1.27; Top Overlay "19" at 110.744,49.784 h1.27; Top Overlay "1" at 83.82,49.784 h1.27; Top Overlay "2" at 83.82,52.324 h1.27
L1: Top Overlay "+" at 62.726,56.41 h1.5 r90
L2: Top Overlay "+" at 104.914,117.834 h1.5 r270
Q1: Top Overlay "2" at 75.453,51.316 h1.5 r90; Top Overlay "1" at 75.453,49.026 h1.5 r90; Top Overlay "3" at 75.453,53.856 h1.5 r90
Vreg1: Top Overlay "2" at 41.417,81.796 h1.5 r90; Top Overlay "1" at 41.417,79.506 h1.5 r90; Top Overlay "3" at 41.417,84.336 h1.5 r90
Vreg2: Top Overlay "2" at 137.937,89.416 h1.5 r90; Top Overlay "1" at 137.937,87.126 h1.5 r90; Top Overlay "3" at 137.937,91.956 h1.5 r90
Vreg3: Top Overlay "2" at 137.734,111.438 h1.5 r90; Top Overlay "1" at 137.734,109.148 h1.5 r90; Top Overlay "3" at 137.734,113.978 h1.5 r90